# Altium PCB PCB.PcbDoc
Units mil, origin at the board's own origin, x right, y up, seen from the top; angles counter-clockwise.
Board outline 2000 x 1500 mil, 4 copper layers (Top Layer, Layer 1, Layer 2, Bottom Layer), stack 23.756 mil thick; 28 components, 40 nets, 148 pads, 78 vias.
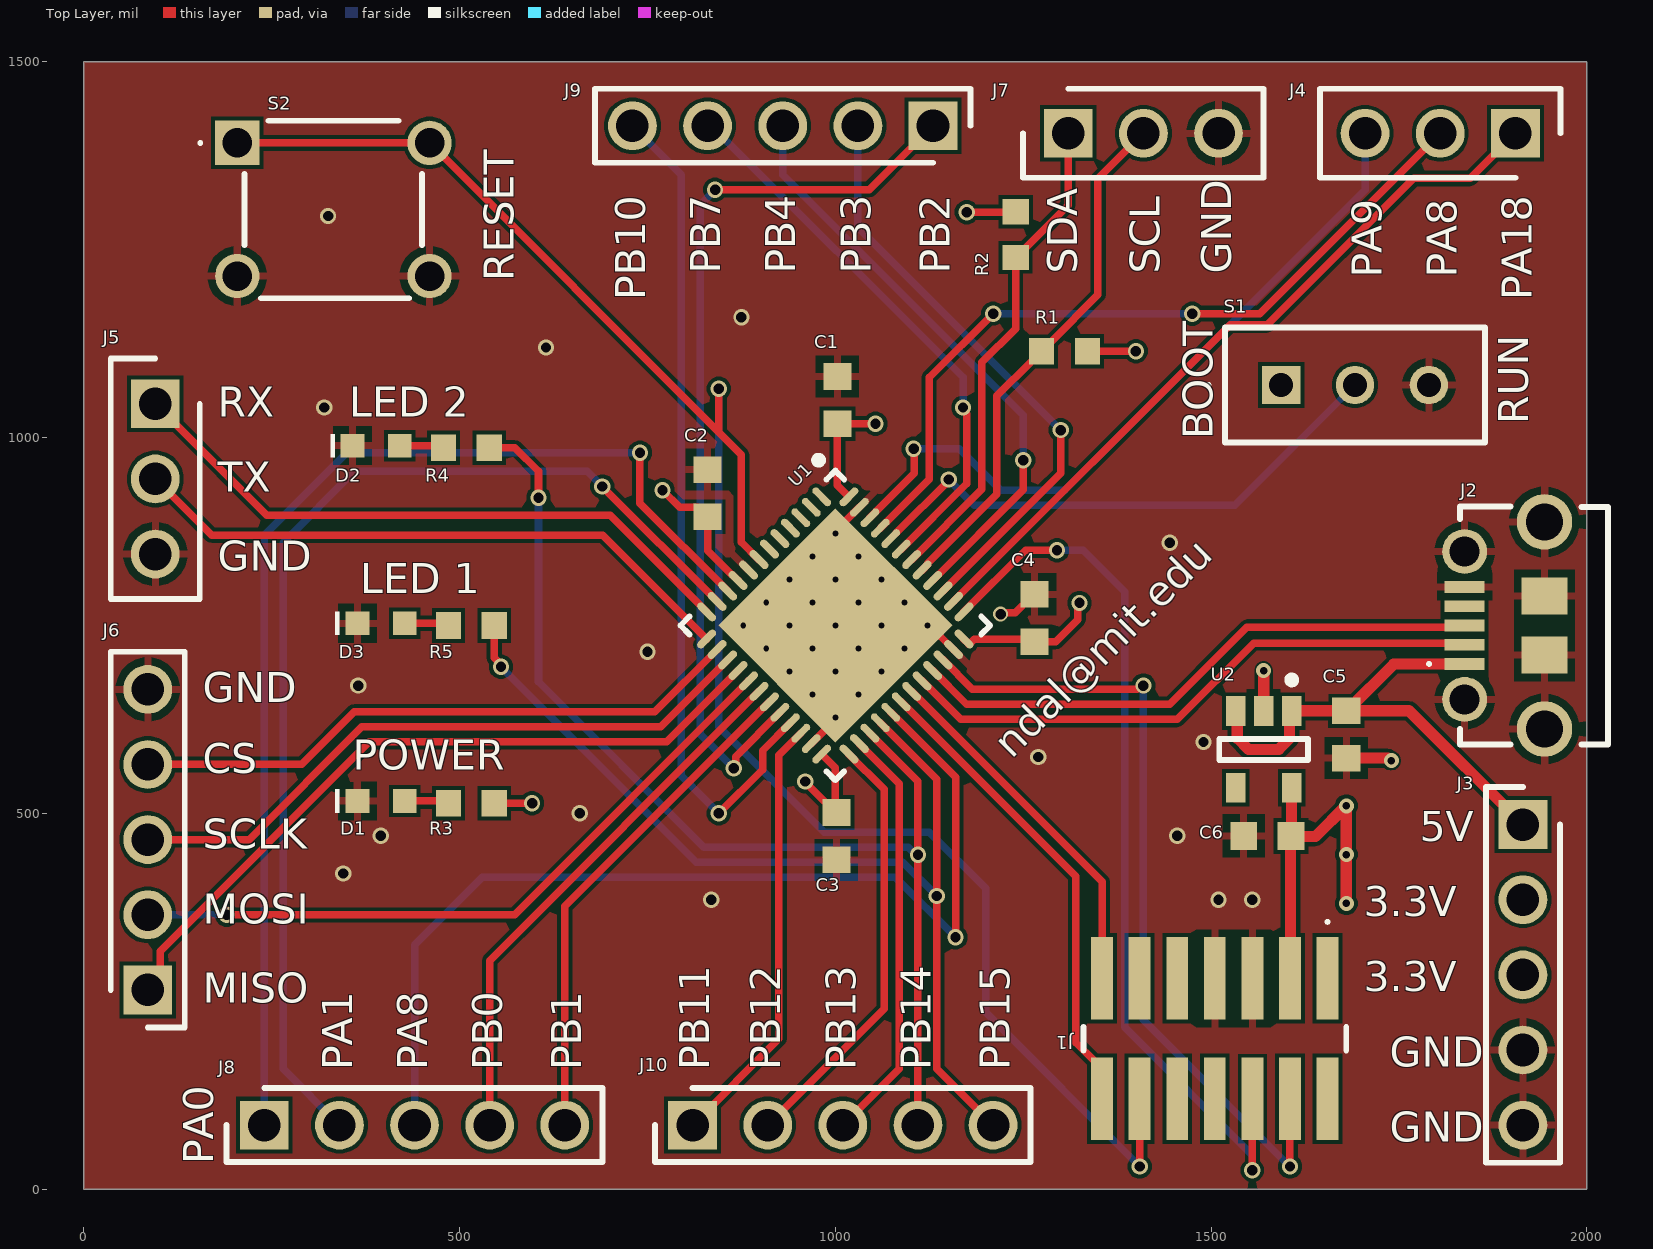
[diagram p0: Top Layer view]
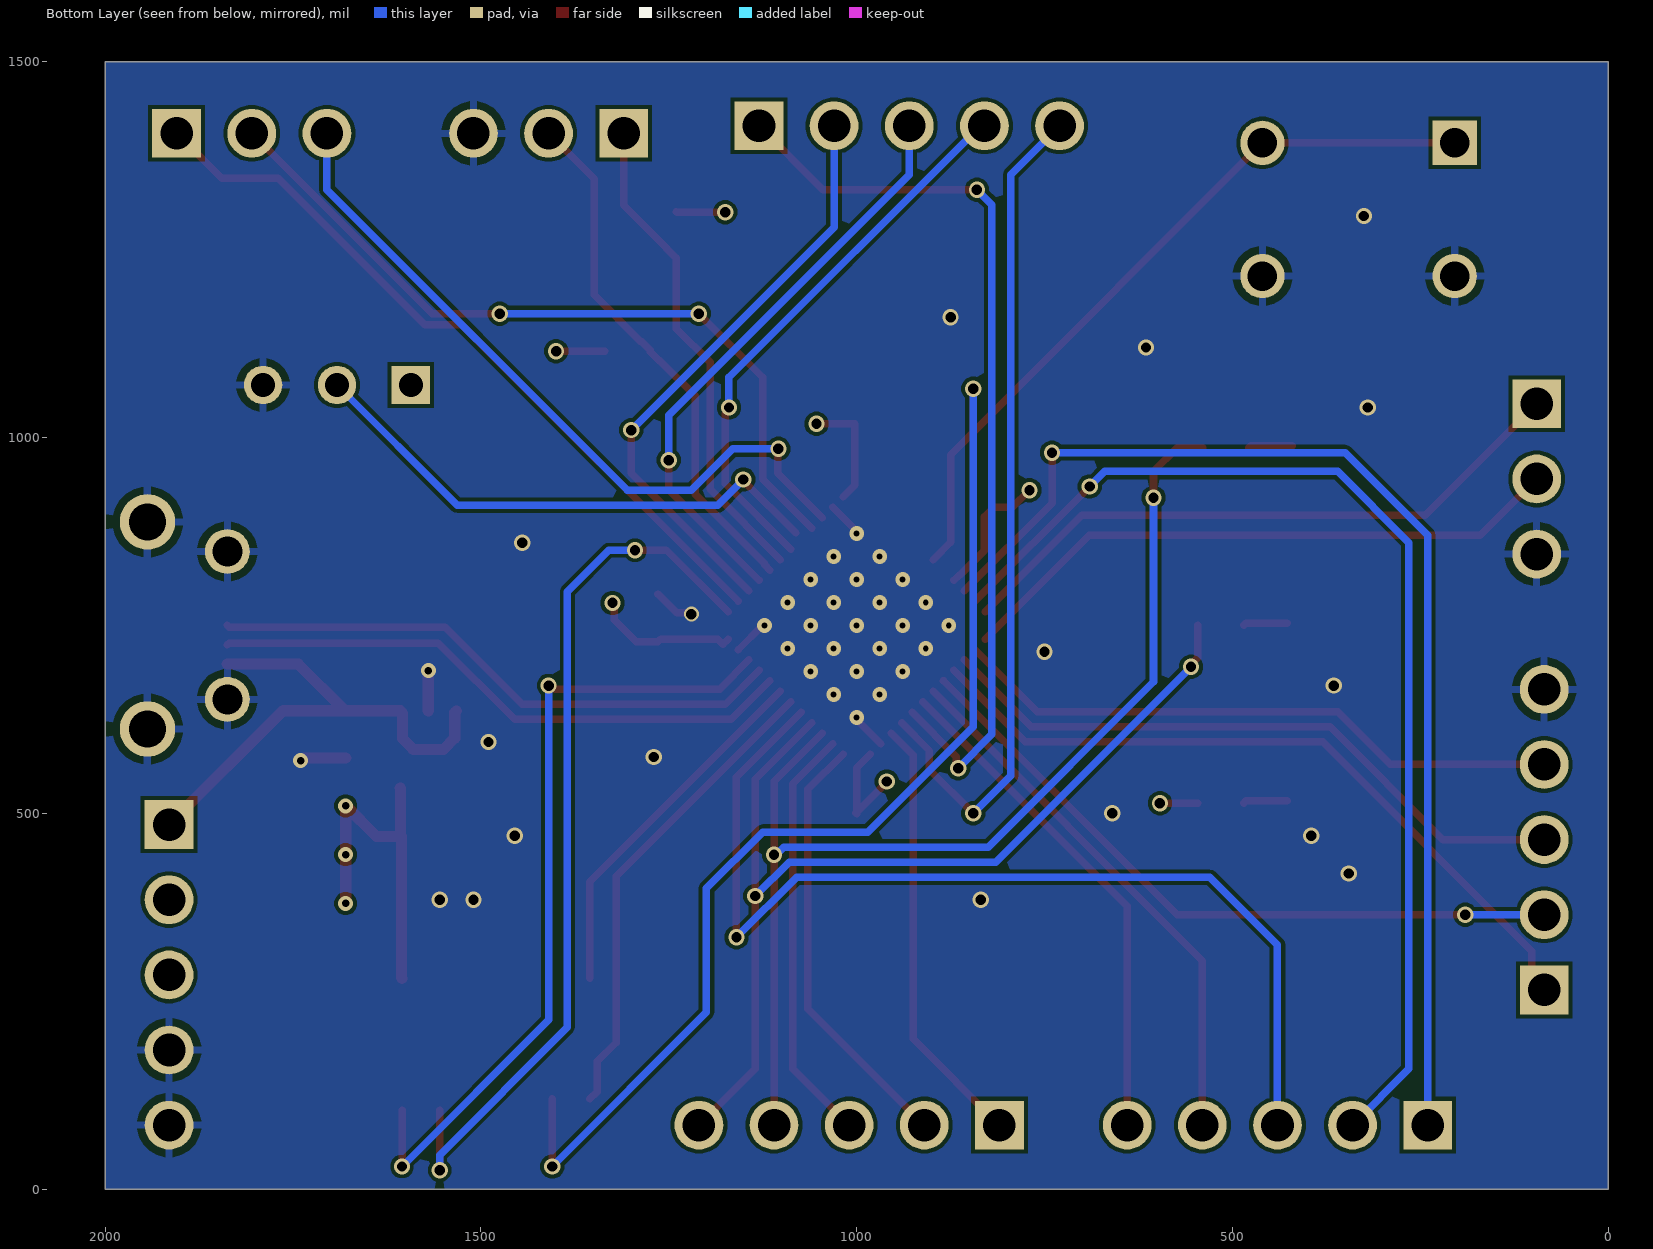
[diagram p1: Bottom Layer view, seen from below]
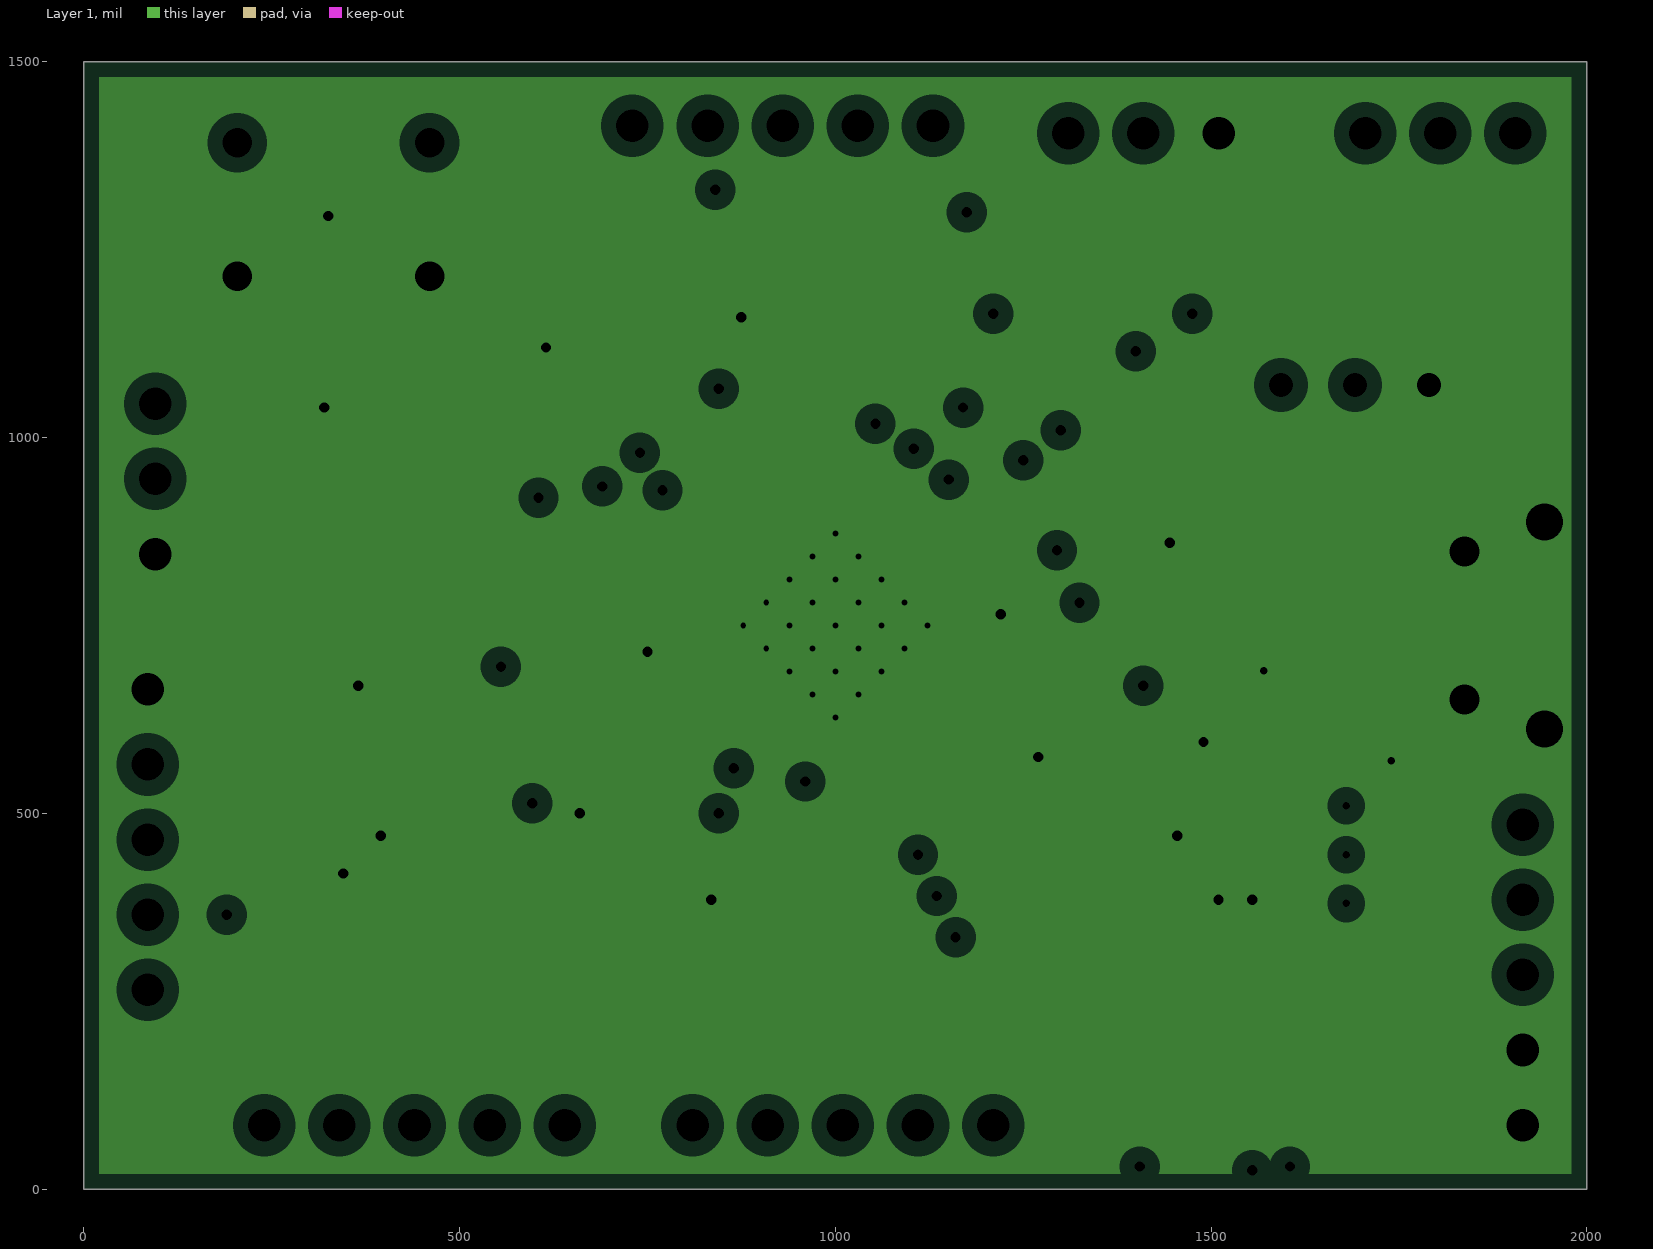
[diagram p2: Layer 1, clearances drawn from the general rule]
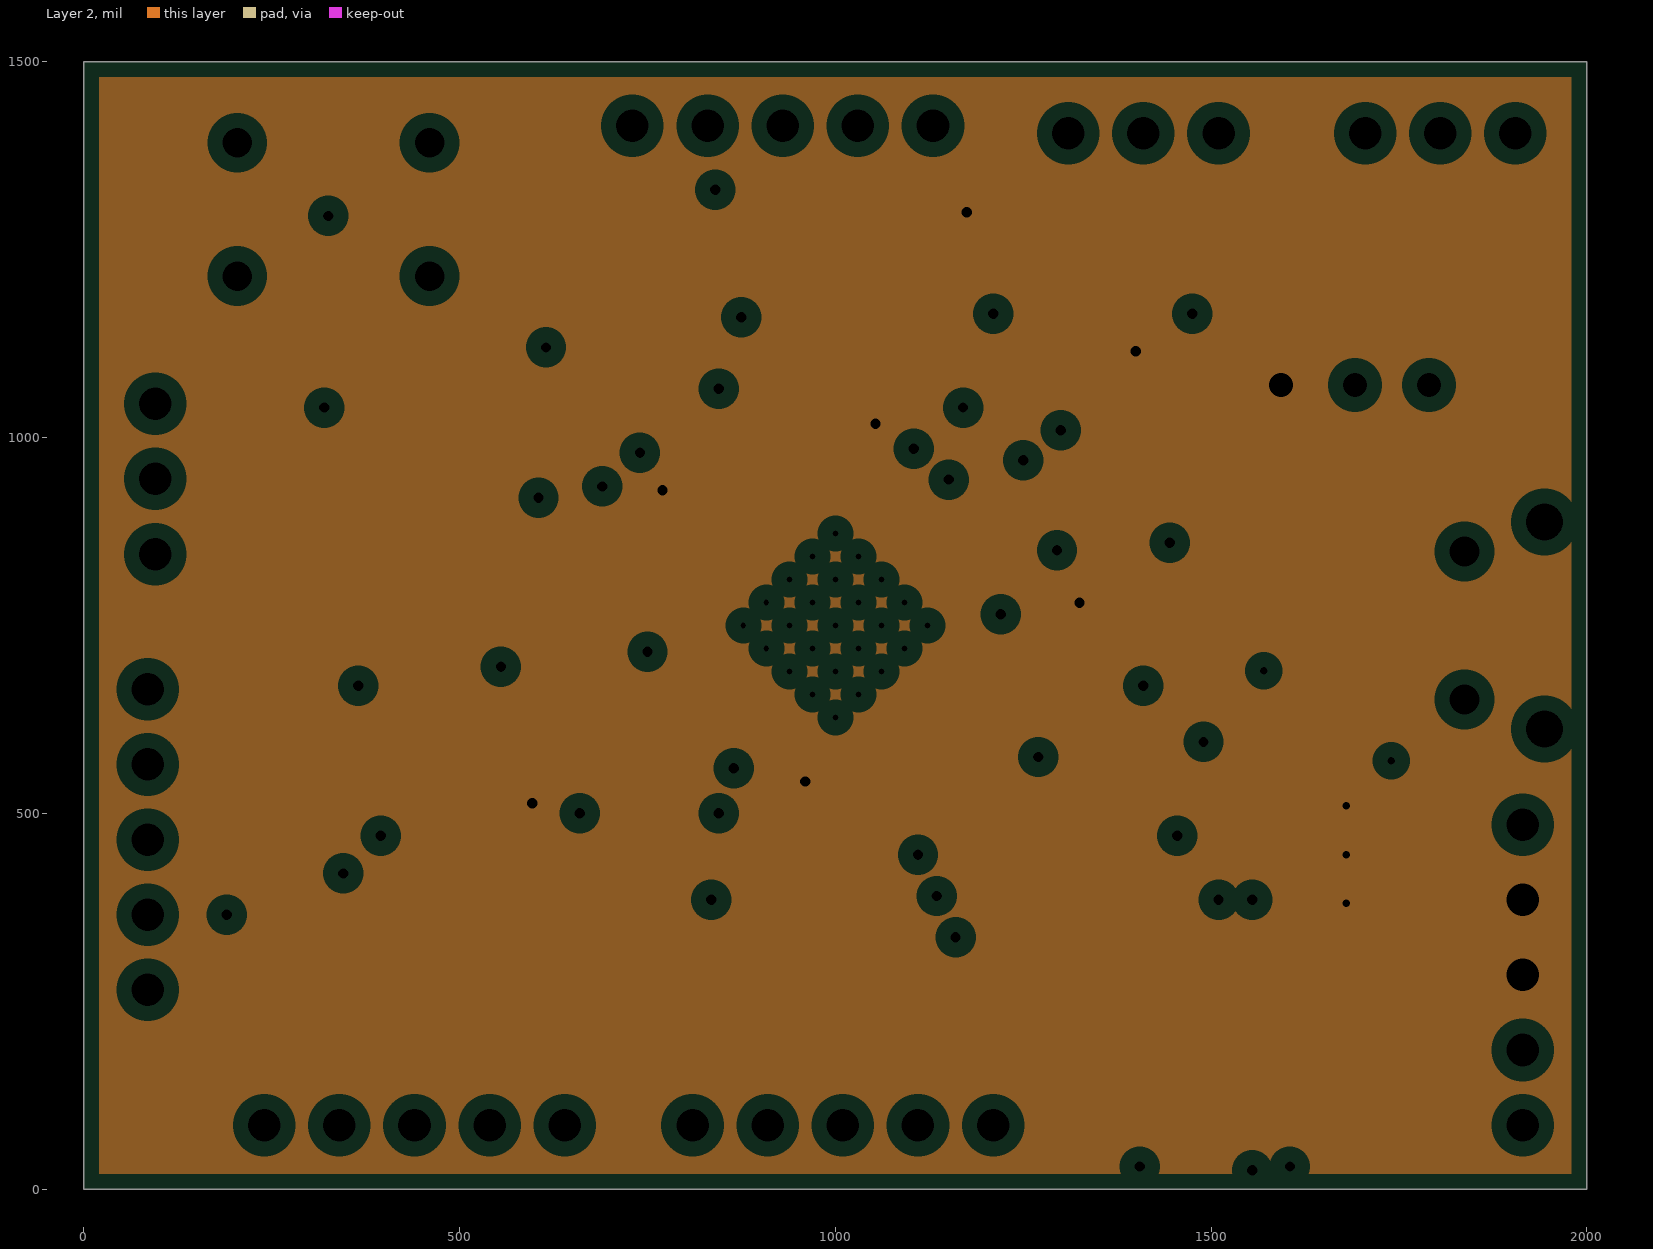
[diagram p3: Layer 2, clearances drawn from the general rule]
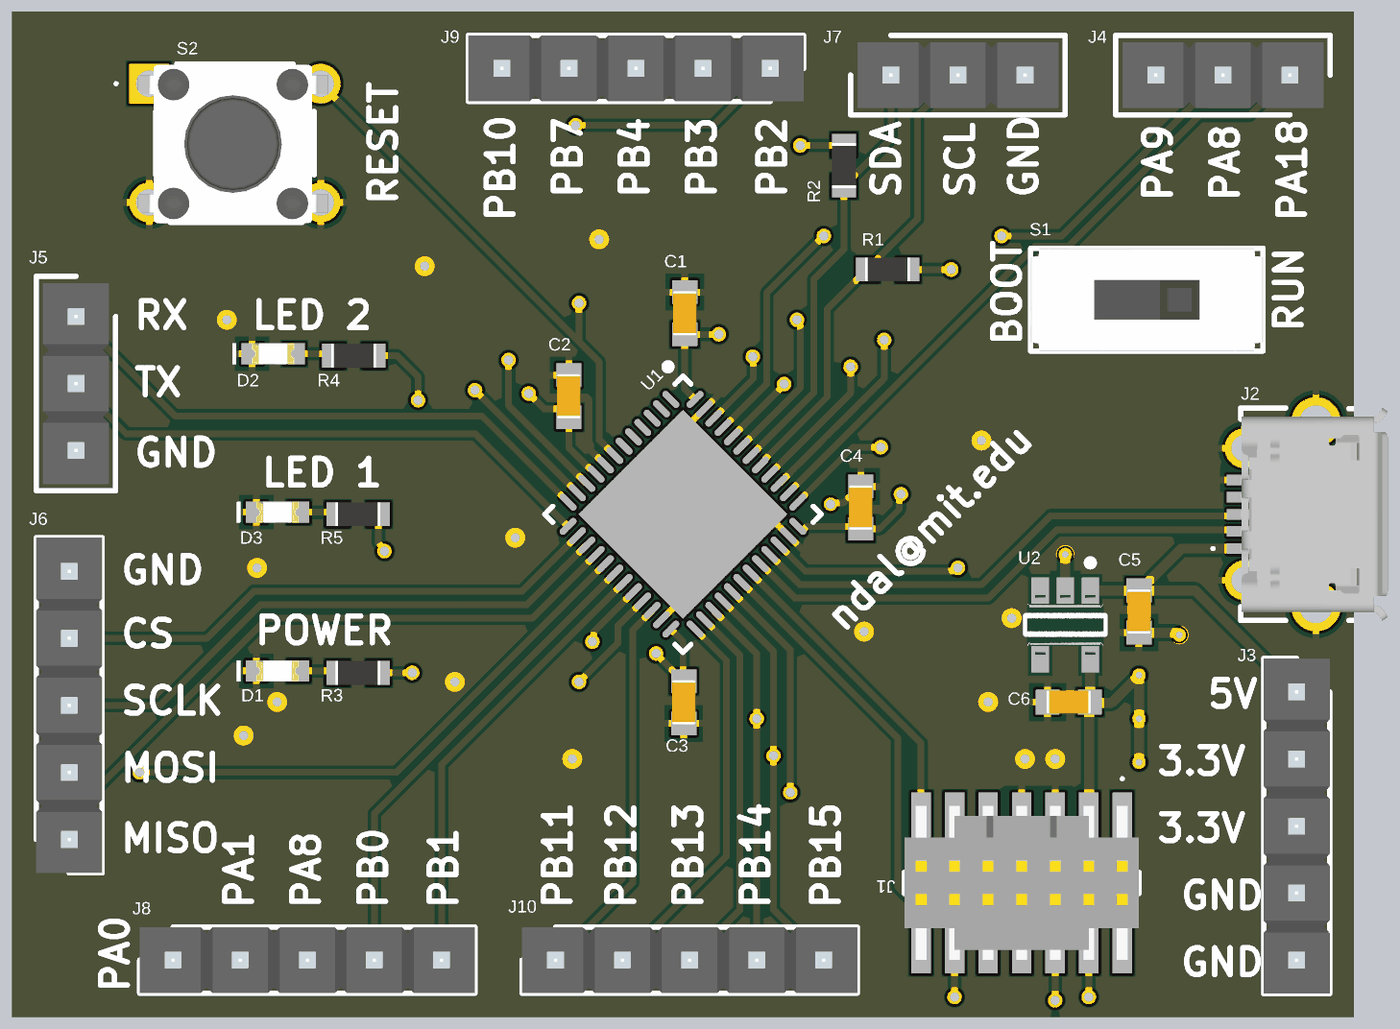
[diagram p4: 3D render of the assembled board from above, using the file's embedded part models]

## Layer stack, top to bottom
Top Solder: solder mask 0.4, Solder Resist, Dk 3.5
Top Layer: signal copper 1.4
Dielectric 2: prepreg 2.8, PP-006, Dk 4.1
Layer 1: plane copper 1.378, net GND
Dielectric 1: dielectric 12.6, FR-4, Dk 4.8
Layer 2: plane copper 1.378, net 3.3V
Dielectric 3: prepreg 2.8, PP-006, Dk 4.1
Bottom Layer: signal copper 1.4
Bottom Solder: solder mask 0.4, Solder Resist, Dk 3.5

## Board outline
0,0 0,1500 2000,1500 2000,0

## Design rules (kind name [scope] priority, off if disabled: settings)
Clearance [All] p1: gap=5 ignorepadtopadclearanceinfootprint=FALSE
DiffPairsRouting [All] p1: maxlimit=10 minlimit=10 mostfreqgap=10 toplayer_minwidth=15 toplayer_maxwidth=15 toplayer_prefwidth=15 bottomlayer_minwidth=15 bottomlayer_maxwidth=15 bottomlayer_prefwidth=15 maxuncoupledlength=500
HoleSize [All] p1: absolutevalues=TRUE maxlimit=1000 minlimit=1 maxpercent=80.000 minpercent=20.000
MinimumSolderMaskSliver [All] p1 off: minsoldermaskwidth=10
PlaneClearance [All] p1: clearance=20
PlaneConnect [All] p1: planeconnectstyle=Relief reliefexpansion=20 reliefentries=4 reliefconductorwidth=10 reliefairgap=10
PolygonConnect PolygonConnect_1 [isVia] p1: connectstyle=Direct reliefconductorwidth=10 reliefentries=4 polygonreliefangle="90 Angle" airgapwidth=10
PolygonConnect [All] p2: connectstyle=Relief reliefconductorwidth=10 reliefentries=4 polygonreliefangle="90 Angle" airgapwidth=10
RoutingVias [All] p1: holewidth=13.78 width=21.65 viastyle="Through Hole" minholewidth=13.78 minwidth=21.65 maxholewidth=13.78 maxwidth=21.65
SilkToSilkClearance [All] p1 off: silktosilkclearance=10
SilkToSolderMaskClearance [IsPad] p1 off: minsilkscreentomaskgap=10 clearancetoexposedcopper=TRUE
SolderMaskExpansion [All] p1: expansion=4 istentingtop=FALSE
SupplyNets "Schematic Supply Nets_2" [InNet('3.3V')] p1: voltage=0.000
SupplyNets "Schematic Supply Nets_1" [InNet('GND')] p2: voltage=0.000
SupplyNets "Schematic Supply Nets" [InNet('+5')] p3: voltage=0.000
Width [All] p1: maxlimit=1000 minlimit=10 preferedwidth=10
23 further rules are at their usual default settings.

## Classes and differential pairs
component class STM: C1 C2 C3 C4 J1 J2 S1 S2 U1
component class Power: C5 C6 U2
component class LEDs: D1 D2 D3 R3 R4 R5
component class Headers: J3 J4 J5 J6 J7 J8 J9 J10 R1 R2
differential pair USB: +USB_P -USB_N

## Components (designator, comment, footprint, x,y, rotation, side; value= is the part's Value field where it differs from the comment)
C1 "CAP .1uF" CAP_0603 1002.8,1049.89 r270 top value=100nF
C2 "CAP .1uF" CAP_0603 829.77,925.95 r270 top value=100nF
C3 "CAP .1uF" CAP_0603 1001.35,469.56 r90 top value=100nF
C4 "CAP .1uF" CAP_0603 1265,760 r270 top value=100nF
C5 "CAP 1uF" CAP_0603 1680,605 r90 top value=1µF
C6 "CAP 1uF" CAP_0603 1575,470 r0 top value=1µF
D1 "GREEN LED" WL-SMCW_0603_150060xx75000 395.51,516.44 r0 top
D2 "GREEN LED" WL-SMCW_0603_150060xx75000 389.02,989.33 r0 top
D3 "GREEN LED" WL-SMCW_0603_150060xx75000 395.51,752.89 r0 top
J1 "ST-LINK CONNECTOR" FTSH10701LDVKTR 1505,200.12 r180 top
J2 "MICRO USB" 101181940001LF 1930,750 r90 top
J3 ".1\" HEADER 5PIN" HDRV5W64P0X254_1X5_1270X250X850P 1915,485 r270 top
J4 ".1\" HEADER 3PIN" HDRV3W64P0X254_1X3_762X250X952P 1905,1405 r180 top
J5 ".1\" HEADER 3PIN" HDRV3W64P0X254_1X3_762X250X952P 95,1045 r270 top
J6 ".1\" HEADER 5PIN" HDRV5W64P0X254_1X5_1270X250X850P 85,265 r90 top
J7 ".1\" HEADER 3PIN" HDRV3W64P0X254_1X3_762X250X952P 1310,1405 r0 top
J8 ".1\" HEADER 5PIN" HDRV5W64P0X254_1X5_1270X250X850P 240,85 r0 top
J9 ".1\" HEADER 5PIN" HDRV5W64P0X254_1X5_1270X250X850P 1130,1415 r180 top
J10 ".1\" HEADER 5PIN" HDRV5W64P0X254_1X5_1270X250X850P 810,85 r0 top
R1 "RES 2.2k" RES_0603 1305,1115 r0 top value=2.2k
R2 "RES 2.2k" RES_0603 1240,1270 r90 top value=2.2k
R3 "RES 1.5k" RES_0603 515.51,513.56 r0 top value=1.5k
R4 "RES 1.5k" RES_0603 509.02,986.44 r0 top value=1.5k
R5 "RES 1.5k" RES_0603 515.51,750 r0 top value=1.5k
S1 "SLIDE SWITCH" SLW8839352AD 1593.15,1070 r0 top
S2 "BUTTON" TS026643BK100SCRD 204.09,1392.17 r0 top
U1 "STM32F072CBU6TR" STM-UFQFPN48_L 1000,750 r315 top
U2 "3.3V LDO 300mA" FP-SOT23-5LD-PL-1-MFG 1570,585 r270 top

## Footprints (in the part's own frame and the unit in brackets; to place one, negate y for a bottom-side part, rotate by r counter-clockwise, add the part's x,y. Pads: shape width x height; smd on the part's side, far side on the other; paste and mask are expansions set on the pad)
101181940001LF [mm]
  rect 0.4x1.35 smd: 1(-1.3,2.35) 2(-0.65,2.35) 3(0,2.35) 4(0.65,2.35) 5(1.3,2.35)
  round 1.515 hole 1.01: MH1(-2.5,2.35) MH4(2.5,2.35)
  round 1.875 hole 1.25: MH2(-3.5,-0.35) MH3(3.5,-0.35)
  rect 1.25x1.55 smd: MP1(-1,-0.35) MP2(1,-0.35)
  silkscreen extent -4.03,-2.5 4.03,3.6, body extent -4.02,-3.07 4.02,2.51, height 2.76
CAP_0603 [mm]
  rect 0.9x0.95 smd: 1(-0.8,0) 2(0.8,0)
  body extent -0.85,-0.45 0.85,0.45, height 0.55
FP-SOT23-5LD-PL-1-MFG [mm]
  rect 1x0.66 smd paste+0 mask+0: 1(-1.3,0.95) 2(-1.3,0) 3(-1.3,-0.95) 4(1.3,-0.95) 5(1.3,0.95)
  silkscreen extent -2.47,-1.5 0.35,1.5, body extent -1.9,-1.6 1.9,1.6, height 0.25
FTSH10701LDVKTR [mm]
  rect 0.74x2.79 smd: 1(-3.81,-2.035) 2(-3.81,2.035) 3(-2.54,-2.035) 4(-2.54,2.035) 5(-1.27,-2.035) 6(-1.27,2.035) 7(0,-2.035) 8(0,2.035) 9(1.27,-2.035) 10(1.27,2.035) 11(2.54,-2.035) 12(2.54,2.035) 13(3.81,-2.035) 14(3.81,2.035)
  silkscreen extent -4.44,-4 4.44,0.4, body extent -4.44,-2.92 4.44,2.92, height 6.12
HDRV3W64P0X254_1X3_762X250X952P [mm]
  rect 1.65x1.65 hole 1.1: 1(0,0)
  round 1.65 hole 1.1: 2(2.54,0) 3(5.08,0)
  silkscreen extent -1.52,-1.5 6.6,1.5, body extent -1.27,-1.25 6.35,1.25, height 9.52
HDRV5W64P0X254_1X5_1270X250X850P [mm]
  rect 1.65x1.65 hole 1.1: 1(0,0)
  round 1.65 hole 1.1: 2(2.54,0) 3(5.08,0) 4(7.62,0) 5(10.16,0)
  silkscreen extent -1.27,-1.25 11.43,1.25, body extent -1.27,-1.25 11.43,1.25, height 8.5
RES_0603 [mm] "Chip Resistor, 2-Leads, Body 1.60x0.80mm, IPC Medium Density"
  rect 0.85x0.9 smd: 1(-0.775,0) 2(0.775,0)
  body extent -0.85,-0.45 0.85,0.45, height 0.55
SLW8839352AD [mm]
  rect 1.3x1.3 hole 0.8: 1(0,0)
  round 1.3 hole 0.8: 2(2.5,0) 3(5,0)
  silkscreen extent -2.5,-1.95 6.9,1.95, body extent -1.9,-1.95 6.9,1.95, height 5.5
STM-UFQFPN48_L [mm] "QFN, 48-Leads, Body 7.1x7.1mm, Pitch 0.5mm, Thermal Pad 5.6x5.6mm, IPC High Density"
  oval 0.8x0.25 smd: 1(-3.4,2.75) 2(-3.4,2.25) 3(-3.4,1.75) 4(-3.4,1.25) 5(-3.4,0.75) 6(-3.4,0.25) 7(-3.4,-0.25) 8(-3.4,-0.75) 9(-3.4,-1.25) 10(-3.4,-1.75) 11(-3.4,-2.25) 12(-3.4,-2.75) 25(3.4,-2.75) 26(3.4,-2.25) 27(3.4,-1.75) 28(3.4,-1.25) 29(3.4,-0.75) 30(3.4,-0.25) 31(3.4,0.25) 32(3.4,0.75) 33(3.4,1.25) 34(3.4,1.75) 35(3.4,2.25) 36(3.4,2.75)
  oval 0.25x0.8 smd: 13(-2.75,-3.4) 14(-2.25,-3.4) 15(-1.75,-3.4) 16(-1.25,-3.4) 17(-0.75,-3.4) 18(-0.25,-3.4) 19(0.25,-3.4) 20(0.75,-3.4) 21(1.25,-3.4) 22(1.75,-3.4) 23(2.25,-3.4) 24(2.75,-3.4) 37(2.75,3.4) 38(2.25,3.4) 39(1.75,3.4) 40(1.25,3.4) 41(0.75,3.4) 42(0.25,3.4) 43(-0.25,3.4) 44(-0.75,3.4) 45(-1.25,3.4) 46(-1.75,3.4) 47(-2.25,3.4) 48(-2.75,3.4)
  rect 5.6x5.6 smd: 49(0,0)
  silkscreen extent -4.47,-3.7 3.7,3.7, body extent -3.55,-3.55 3.55,3.55, height 0.6
TS026643BK100SCRD [mm]
  rect 1.5x1.5 hole 1: 1(0,0)
  round 1.5 hole 1: 2(6.5,0) 3(0,-4.5) 4(6.5,-4.5)
  silkscreen extent -1.3,-5.25 6.25,0.75, body extent -0.43,-5.29 6.78,0.71, height 4.3
WL-SMCW_0603_150060xx75000 [mm] "SMD Mono-color Chip LED, body 1.60 x 0.80 mm"
  rect 0.8x0.8 smd: 1(-0.8,0) 2(0.8,0)
  silkscreen extent -1.55,-0.4 -1.4,0.4, body extent -0.8,-0.4 0.8,0.4, height 0.7

## Part data
C1 C2 C3 C4: library part CMP-001-00086-1, "Capacitor .1uF 10% 16V 0603", Tolerance=10%, Voltage Rating=16V, Design Item ID="CAP .1uF", Source=Generic_Schematic_Library.SchLib
C5 C6: library part CMP-001-00085-1, "Capacitor 1uF 10% 16V 0603", Tolerance=10%, Voltage Rating=16V, Design Item ID="CAP 1uF", Source=Generic_Schematic_Library.SchLib
D1 D2 D3: library part CMP-004-00006-2, "Single Color LED, Green, Water Clear, 1.1mm", Forward Current=30mA, Max Operating Temperature=85°C, Min Operating Temperature=-40°C, Component Type=Standard, Design Item ID="GREEN LED", Mounting Technology="Surface Mount", Pins=2, RoHS Compliant=Yes, Source="Integrated_Library - 04.08.25 - 13.21.SchLib"
J1: library part CMP-002-00025-2, "Connector", Arrow Part Number=FTSH-107-01-L-DV-K-TR, Manufacturer_Name=SAMTEC, Mouser Part Number=200-FTSH10701LDVKTR, Arrow Price/Stock=https://www.arrow.com/en/products/ftsh-107-01-l-dv-k-tr/samtec?utm_currency=USD&region=nac, Component Type=Standard, Datasheet Link=https://suddendocs.samtec.com/prints/ftsh-1xx-xx-xxx-dv-xxx-xxx-x-xx-mkt.pdf?_gl=1*mdiyn1*_ga*MTcyMTUxMTIwMy4xNzEyMDQxMTc2*_ga_3KFNZC07WW*MTcxMjEzMDIxOS4yLjEuMTcxMjEzMDI1NC4yNS4wLjA., Design Item ID="ST-LINK CONNECTOR", Height=6.25mm, Manufacturer_Part_Number=FTSH-107-01-L-DV-K-TR, Mouser Price/Stock=https://www.mouser.co.uk/ProductDetail/Samtec/FTSH-107-01-L-DV-K-TR?qs=%252BZP6%2F%252BtExtDlh0wyxE013Q%3D%3D, Pins=7, Source=SamacSys.SchLib
J2: library part CMP-00030-1, "Connector", Arrow Part Number=10118194-0001LF, Manufacturer_Name="Amphenol Communications Solutions", Arrow Price/Stock=https://www.arrow.com/en/products/10118194-0001lf/amphenol-fci?utm_currency=USD&region=nac, Datasheet Link=https://www.amphenol-cs.com/micro-usb-101181940001lf.html, Design Item ID=10118194-0001LF, Height=3.25mm, Manufacturer_Part_Number=10118194-0001LF, Source=SamacSys.SchLib
J3 J6 J8 J9 J10: library part CMP-00039-1, "Connector", Design Item ID=".1\" HEADER 5PIN", Source=SamacSys.SchLib
J4 J5 J7: library part CMP-00038-1, "Connector", Design Item ID=".1\" HEADER 3PIN", Source=SamacSys.SchLib
R1 R2: library part CMP-009-00804-1, "Resistor 2.2k 5% 100 mW 0603", Power=100mW, Tolerance=5%, Design Item ID="RES 2.2k", Source=Generic_Schematic_Library.SchLib
R3 R4 R5: library part CMP-009-00797-1, "Resistor 1.5k 5% 100 mW 0603", Power=100mW, Tolerance=5%, Design Item ID="RES 1.5k", Source=Generic_Schematic_Library.SchLib
S1: library part CMP-00033-2, "Switch", Arrow Part Number=SLW-883935-2A-D, Manufacturer_Name="Same Sky", Mouser Part Number=179-SLW-883935-2A-D, Arrow Price/Stock=https://www.arrow.com/en/products/slw-883935-2a-d/cui-devices?utm_currency=USD&region=nac, Datasheet Link=https://www.sameskydevices.com/product/resource/supplyframepdf/slw-883935-2a-d.pdf, Design Item ID=SLW-883935-2A-D, Height=6.1mm, Manufacturer_Part_Number=SLW-883935-2A-D, Mouser Price/Stock=https://www.mouser.co.uk/ProductDetail/Same-Sky/SLW-883935-2A-D?qs=1Kr7Jg1SGW%2Fv9j8ky6fn%2FQ%3D%3D, Source=SamacSys.SchLib
S2: library part CMP-00032-1, "Button", Arrow Part Number=TS02-66-43-BK-100-SCR-D, Manufacturer_Name="Same Sky", Mouser Part Number=179-TS026643BK100SCR, Arrow Price/Stock=https://www.arrow.com/en/products/ts02-66-43-bk-100-scr-d/cui-devices?utm_currency=USD&region=nac, Datasheet Link=https://www.sameskydevices.com/product/resource/ts02.pdf, Design Item ID=TS02-66-43-BK-100-SCR-D, Height=4.5mm, Manufacturer_Part_Number=TS02-66-43-BK-100-SCR-D, Mouser Price/Stock=https://www.mouser.co.uk/ProductDetail/Same-Sky/TS02-66-43-BK-100-SCR-D?qs=A6eO%252BMLsxmSl2Xr0zcGVOg%3D%3D, Source=SamacSys.SchLib
U1: library part CMP-0304-00174-1, "ARM Cortex-M0 32-bit MCU, 128 KB Flash, 16 KB Internal RAM, 37 I/Os, 48-Pin UFQFPN, -40 to 85 degC, Tape and Reel", I/Os (High Current)=37, Operating Frequency(F) (Processor speed) (MHz)=48, Package Description="48-Pin Ultra Thin Fine Pitch Quad Flat No-Lead, 7 x 7 x 0.6 mm Body, 0.5 mm Pitch, Exposed Pad", Package Reference=UFQFPN48, Supply Voltage(Vcc) min (V)=2, ComponentLink1Description="Manufacturer URL", ComponentLink1URL=http://www.st.com/, ComponentLink2Description=Datasheet, ComponentLink2URL=http://www.st.com/st-web-ui/static/active/en/resource/technical/document/datasheet/DM00090510.pdf, Core="ARM Cortex-M0", D/A Converter=1, DatasheetVersion="Rev. 5", FLASH Size (Prog) (kB)=128, Internal RAM Size (kB)=16, Mounting Technology="Surface Mount", Packing="Tape and Reel"
U2: library part CMP-00031-1, "Fixed Positive LDO Regulator, 3.3V, 0.38V Dropout, CMOS, PDSO5", RoHS Compliant=Yes

## Via types
v1: diameter 21.65, hole 13.78, Top Layer to Bottom Layer, 47 vias
v2: diameter 19.68, hole 7.87, Top Layer to Bottom Layer, 25 vias
v3: diameter 20, hole 10, Top Layer to Bottom Layer, 5 vias
v4: diameter 20, hole 14, Top Layer to Bottom Layer, 1 vias

## Nets (pads, with @x,y where several pads share a name; then routed paths per layer and width w, separated by ;. In a path a pad name is that pad's centre, name@x,y a point inside that pad or via, vN(x,y) a via of type N, cw(c..) or ccw(c..) an arc to the next point about the centre after c; other vN are vias at no path point)
3.3V: C1.2 C2.2 C3.2 C4.2 C6.2 J1.3 J3.2 J3.3 R1.2 R2.2 R3.2 S1.1 U1.9 U1.24 U1.36 U1.48 U2.5 | length 1322
  Top Layer w10: R3.2 v1(596.44,513.56) ; v1(770,930) 792.83,907.17 817.06,907.17 C2.2 ; C2.2@830,894.45 830,849.49 862.09,817.4 863,817.4 U1.9 ; v1(960,542.4) 960,541.42 C3.2@1000,501.42 ; U1.24@981.96,578.74 1000,560.7 C3.2@1000,501.42 ; C3.2@1000,499.66 C3.2@1000,501.42 ; C3.2 1000.37,501.05 C3.2@1000,501.42 ; U1.48 1002.8,936.5 C1.2 v1(1053.39,1018.39) ; U1.36 1177.91,725.2 1178.02,725.2 1184.72,731.9 1260.61,731.9 C4.2@1262.52,730 ; v1(1175,1300) 1239.49,1300 R2.2 ; C4.2 1293.5,728.5 1322.77,757.77 1322.77,777.77 v1(1325,780) ; R1.2 v1(1400,1115)
  Top Layer w15: J1.3 1605.75,280.98 1605.75,469.25 C6.2 1606.95,470.45 1606.95,533.37 U2.5 ; C6.2@1606.5,469.02 1639.02,469.02 v3(1680,510) v3(1680,445) v3(1680,380)
+5: C5.2 J2.1 J3.1 U2.1 U2.3 | length 709.6
  Top Layer w15: U2.3 1535,633.78 1535,600 1550,585 1590,585 1604.54,599.54 1604.54,633.32 1607.56,636.34 1679.84,636.34 C5.2 1763.5,636.5 J3.1 ; C5.2@1680.98,636.5 1743.31,698.82 J2.1
GND: C1.1 C2.1 C3.1 C4.1 C5.1 C6.1 D1.1 D2.1 D3.1 J1.5 J1.7 J2.5 J2.MH1 J2.MH2 J2.MH3 J2.MH4 J2.MP1 J2.MP2 J3.4 J3.5 J5.3 J6.5 J7.3 S1.3 S2.3 S2.4 U1.8 U1.23 U1.35 U1.47 U1.49 U2.2 | length 315.4
  Top Layer w10: U1.23 1000,624.73 v2(1000,627.51) ; v2(1000,872.49) 1000,875.27 U1.47 ; v2(1122.49,750) 1125.27,750 U1.35 ; v4(1220,765) 1221.91,766.91 1239.43,766.91 1264.02,791.5 C4.1
  Top Layer w15: U2.2 v3(1570,690) ; C5.1 1735.14,573.5 1738.65,570 v3(1740,570)
  other v1: 835,385 1510,385 1555,385 345,420 395,470 1455,470 660,500 1270,575 1490,595 365,670 750,715 1445,860 320,1040 615,1120 875,1160 325,1295
  other v2: 969.38,658.13 1030.62,658.13 938.75,688.75 1000,688.75 1061.25,688.75 908.13,719.38 969.38,719.38 1030.62,719.38 1091.87,719.38 877.51,750 938.75,750 1000,750 1061.25,750 908.13,780.62 969.38,780.62 1030.62,780.62 1091.87,780.62 938.75,811.25 1000,811.25 1061.25,811.25 969.38,841.87 1030.62,841.87
NetD1_2: D1.2 R3.1 | length 59.2
  Top Layer w10: D1.2 482.11,516.44 R3.1
NetD2_2: D2.2 R4.1 | length 59.2
  Top Layer w10: D2.2 475.61,989.33 R4.1
NetD3_2: D3.2 R5.1 | length 59.2
  Top Layer w10: D3.2 482.11,752.89 R5.1
NetJ4_1: J4.1 U1.38 | length 1005.8
  Top Layer w10: U1.38 1525.27,1150 1575,1150 1770,1345 1845,1345 J4.1
NetJ4_2: J4.2 U1.45 | length 1042.2
  Top Layer w10: U1.45 1125,944.6 1125,1080 v1(1210,1165) ; v1(1475,1165) 1565,1165 J4.2
  Bottom Layer w10: v1(1210,1165) v1(1475,1165)
NetJ4_3: J4.3 U1.46 | length 980.7
  Top Layer w10: U1.46 1105,952.44 1105,984.17 v1(1104.17,985)
  Bottom Layer w10: v1(1104.17,985) 1165,985 1220,930 1305,930 1705,1330 J4.3
NetJ5_1: J5.1 U1.12 | length 848.5
  Top Layer w10: J5.1 243.42,896.58 700.31,896.58 U1.12
NetJ5_2: J5.2 U1.13 | length 822.1
  Top Layer w10: J5.2 170,870 690.7,870 U1.13
NetJ6_1: J6.1 U1.16 | length 982.2
  Top Layer w10: J6.1 101.62,281.62 101.62,316.62 380,595 775.4,595 U1.16
NetJ6_2: J6.2 U1.17 | length 928.4
  Top Layer w10: v1(190,365) 573.24,365 U1.17
  Bottom Layer w10: J6.2 v1(190,365)
NetJ6_3: J6.3 U1.15 | length 870.7
  Top Layer w10: J6.3 220,465 370,615 767.56,615 U1.15
NetJ6_4: J6.4 U1.14 | length 821.1
  Top Layer w10: J6.4 290,565 360,635 759.73,635 U1.14
NetJ7_1: J7.1 R2.1 U1.42 | length 654.2
  Top Layer w10: U1.42 1195,931.08 1195,1100 1240,1145 R2.1 1240.98,1239.49 1252.72,1251.22 1252.72,1252.2 1310,1309.49 J7.1
NetJ7_2: J7.2 R1.1 U1.41 | length 704.4
  Top Layer w10: U1.41 1123.08,831.32 1123.08,832.93 1215,924.86 1215,1055.51 1261.77,1102.28 1262.76,1102.28 1274.49,1114.02 1274.49,1115.98 1286.22,1127.72 1287.2,1127.72 1349.49,1190 1349.49,1344.49 J7.2
NetJ8_1: J8.1 U1.10 | length 1562.9
  Top Layer w10: v1(740,980) 740,912.56 U1.10
  Bottom Layer w10: J8.1 240,870 350,980 v1(740,980)
NetJ8_2: J8.2 U1.11 | length 1494.9
  Top Layer w10: v1(690,935) 690,934.73 U1.11
  Bottom Layer w10: J8.2 265,160 265,860 360,955 670,955 v1(690,935)
NetJ8_3: J8.3 U1.29 | length 1365.6
  Top Layer w10: U1.29 1160,548.24 v1(1160,335)
  Bottom Layer w10: J8.3 440,325 530,415 1080,415 v1(1160,335)
NetJ8_4: J8.4 U1.18 | length 725.8
  Top Layer w10: J8.4 540,303.92 U1.18
NetJ8_5: J8.5 U1.19 | length 676.2
  Top Layer w10: J8.5 640,376.08 U1.19
NetJ9_1: J9.1 U1.20 | length 1222
  Top Layer w10: v1(840,1330) 1045,1330 J9.1 ; v1(865,560) 867.23,562.23 867.23,575.47 U1.20
  Bottom Layer w10: v1(840,1330) 820,1310 820,605 v1(865,560)
NetJ9_2: J9.2 U1.39 | length 795.8
  Top Layer w10: U1.39 1300,952.56 v1(1300,1010)
  Bottom Layer w10: J9.2 1030,1280 v1(1300,1010)
NetJ9_3: J9.3 U1.40 | length 787.6
  Top Layer w10: U1.40 1250,930.4 v1(1250,970)
  Bottom Layer w10: J9.3 930,1350 1250,1030 v1(1250,970)
NetJ9_4: J9.4 U1.43 | length 745.4
  Top Layer w10: U1.43 1175,938.92 1175,1031.85 1170,1036.85 v1(1170,1040)
  Bottom Layer w10: J9.4 835,1415 1170,1080 v1(1170,1040)
NetJ9_5: J9.5 U1.21 | length 1122.6
  Top Layer w10: v1(845,500) 903.11,558.11 903.11,583.52 U1.21
  Bottom Layer w10: J9.5 795,1350 795,550 v1(845,500)
NetJ10_1: J10.1 U1.22 | length 581.3
  Top Layer w10: J10.1 925,200 925,577.56 U1.22
NetJ10_2: J10.2 U1.25 | length 577.4
  Top Layer w10: J10.2 1065,240 1065,531.78 1018.1,578.68 U1.25
NetJ10_3: J10.3 U1.26 | length 560.7
  Top Layer w10: J10.3 1085,160 1085,539.61 1032.01,592.6 U1.26
NetJ10_4: J10.4 R4.2 U1.27 | length 1506.9
  Top Layer w10: R4.2 573.56,986.44 605,955 v1(605,920) ; U1.27 1110,542.56 v1(1110,445) J10.4
  Bottom Layer w10: v1(605,920) 605,675 825,455 1096.85,455 1106.85,445 v1(1110,445)
NetJ10_5: J10.5 R5.2 U1.28 | length 1362.8
  Top Layer w10: R5.2 546.02,707.13 555,698.15 v1(555,695) ; U1.28 1135,545.4 v1(1135,390) 1135,160 J10.5
  Bottom Layer w10: v1(555,695) 815,435 1090,435 v1(1135,390)
NetS1_2: S1.2 U1.44 | length 735.1
  Top Layer w10: U1.44@1081.32,873.19 1150.81,942.68 v1(1150.81,944.19)
  Bottom Layer w10: v1(1150.81,944.19) 1185,910 1531.57,910 S1.2 ; S1.2@1681.57,1080 S1.2@1691.57,1090
RST: J1.12 S2.1 S2.2 U1.7 | length 2488.8
  Top Layer w10: S2.1 S2.2 845,1007.17 ; v1(845,1065) 845,1007.17 ; U1.7 875,861.08 875,977.17 845,1007.17 ; v1(1405,30) J1.12
  Bottom Layer w10: v1(845,1065) 845,615 985,475 1125,475 1200,400 1200,235 v1(1405,30)
RX: J1.13 U1.31 | length 487
  Top Layer w10: U1.31 1355,408.92 J1.13
SWCLK: J1.6 U1.37 | length 1190.9
  Top Layer w10: U1.37 1253.11,850 v1(1295,850) ; v1(1555,25) J1.6@1555,105
  Bottom Layer w10: v1(1295,850) 1330,850 1385,795 1385,215 1555,45 v1(1555,25)
SWDIO: J1.4 U1.34 | length 1080.7
  Top Layer w10: U1.34 1182.44,665 1401.85,665 1406.85,670 v1(1410,670) ; v1(1605,30) J1.4@1605,105
  Bottom Layer w10: v1(1410,670) 1410,225 v1(1605,30)
TX: J1.14 U1.30 | length 639.3
  Top Layer w10: U1.30 1320,416.08 1320,195 1345.08,169.92 1345.43,169.92 1345.43,129.57 J1.14
USB_N: J2.2 U1.32 | length 786.2
  Top Layer w10: U1.32 1166.76,625 1455,625 1556.6,726.6 1835.29,726.6 J2.2
USB_P: J2.3 U1.33 | length 770.2
  Top Layer w10: U1.33 1174.6,645 1445,645 1525,725 1547.81,747.81 1835.29,747.81 J2.3
pads on no net: J1.1 J1.2 J1.8 J1.9 J1.10 J1.11 J2.4 U1.1 U1.2 U1.3 U1.4 U1.5 U1.6 U2.4

## Polygon pours and split planes (outlines as drawn)
GND on Bottom Layer "GND_L04_P001" (solid, pour order 1): 0,1500 2000,1500 2000,0 0,0
GND on Top Layer "GND_L01_P000" (solid, pour order 0): 0,1500 2000,1500 2000,0 0,0
3.3V on Layer 2 (split plane): 1979.9,20.1 20.1,20.1 20.1,1479.9 1979.9,1479.9
GND on Layer 1 (split plane): 1979.9,20.1 20.1,20.1 20.1,1479.9 1979.9,1479.9

## Silkscreen, mask and mechanical layers (free items; w line width, h text height)
Top Overlay:
  text "PB7" at 847,1218 h40 r90
  text "PB4" at 947,1218 h40 r90
  text "PB3" at 1047,1218 h40 r90
  text "PB2" at 1152,1218 h40 r90
  text "SDA" at 1322,1218 h40 r90
  text "SCL" at 1432,1218 h40 r90
  text "GND" at 1527,1218 h40 r90
  text "PA9" at 1727,1213 h40 r90
  text "PA8" at 1827,1213 h40 r90
  text "RESET" at 572,1208 h40 r90
  text "PB10" at 747,1183 h40 r90
  text "PA18" at 1927,1183 h40 r90
  text "RX" at 178,1028 h40
  text "LED 2" at 353,1028 h40
  text "RUN" at 1922,1018 h40 r90
  text "BOOT" at 1502,998 h40 r90
  text "TX" at 178,928 h40
  text "GND" at 178,823 h40
  text "LED 1" at 368,793 h40
  text "GND" at 158,648 h40
  text "ndal@mit.edu" at 1235,571.31 h40 r45
  text "POWER" at 358,558 h40
  text "CS" at 158,553 h40
  text "5V" at 1778,463 h40
  text "SCLK" at 158,453 h40
  text "3.3V" at 1703,363 h40
  text "MOSI" at 158,353 h40
  text "3.3V" at 1703,263 h40
  text "MISO" at 158,248 h40
  text "GND" at 1738,163 h40
  text "PA1" at 357,158 h40 r90
  text "PA8" at 457,158 h40 r90
  text "PB0" at 557,158 h40 r90
  text "PB1" at 662,158 h40 r90
  text "PB11" at 832,158 h40 r90
  text "PB12" at 927,158 h40 r90
  text "PB13" at 1027,158 h40 r90
  text "PB14" at 1127,158 h40 r90
  text "PB15" at 1232,158 h40 r90
  text "GND" at 1738,63 h40
  text "PA0" at 172,33 h40 r90